# Allegro board CALITESCU ROMEO-ALEXANDRU PROIECT 1 431E.brd
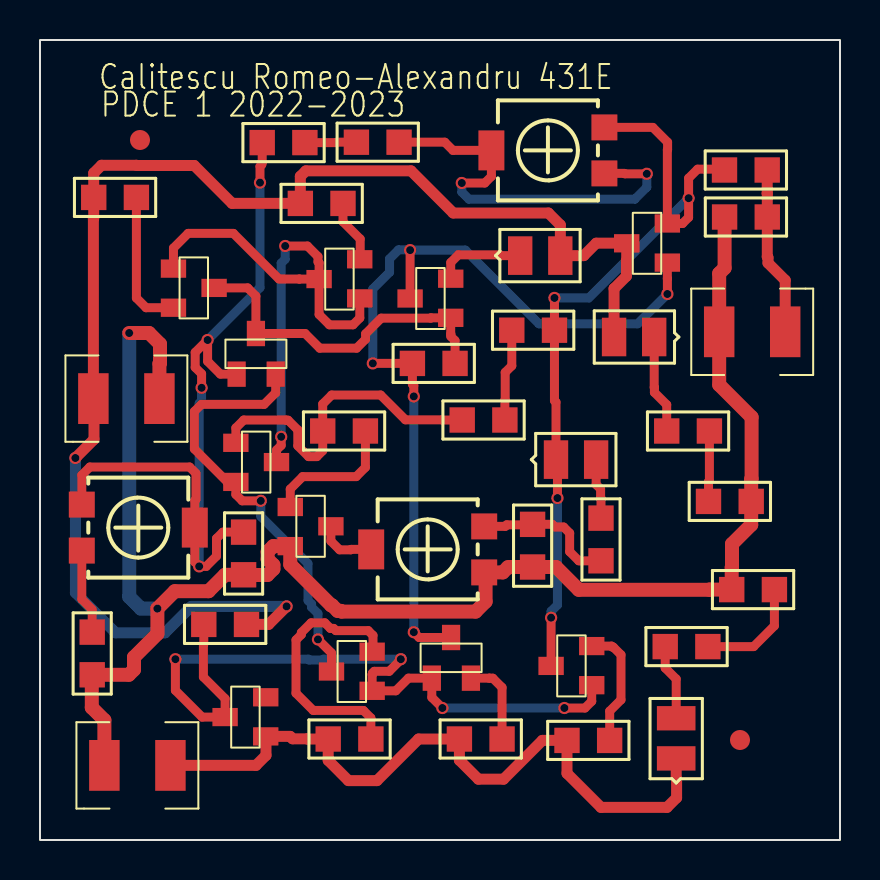
[diagram p0: board, top side]
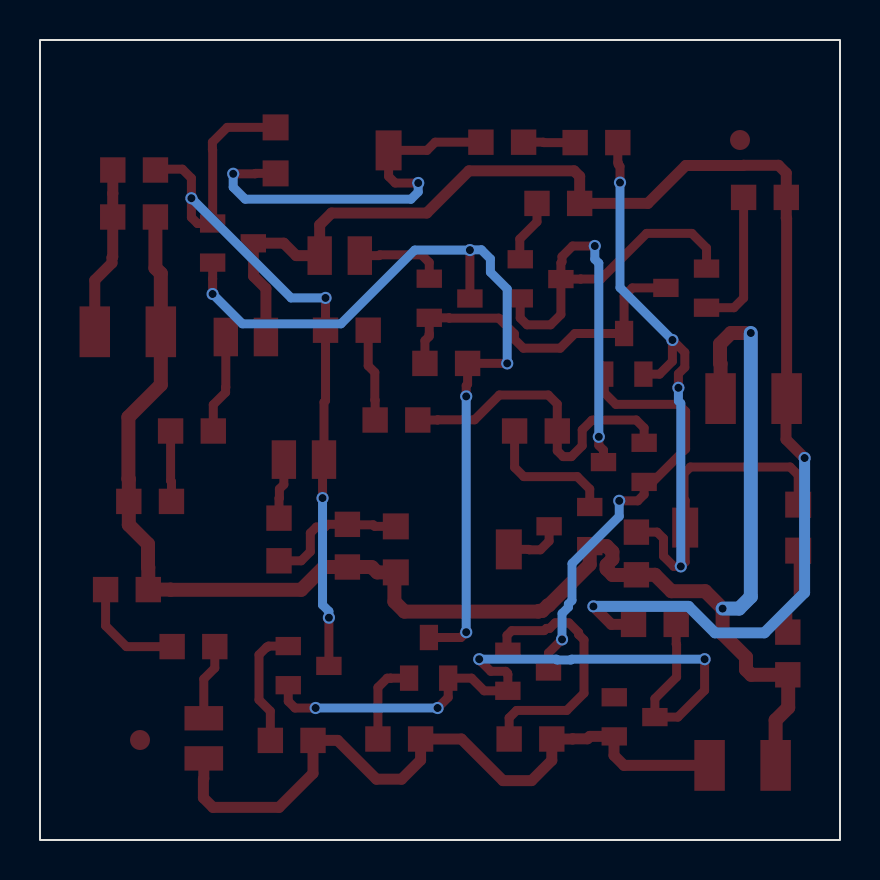
[diagram p1: board, bottom side, seen from below]

Outline 40 x 40 mm; copper layers: TOP, BOTTOM. Coordinates in mm from the lower left corner of the outline.
Outline path: rectangle 0,0 40,40

## Design rules (mm)
nets with their own width: min track width 0.45; nets N00982 N00986 N01026 N01039 N01083 N01217 N01415 N01445 N01479 N01496 N01500 N01504 N01521 N01535 N01539 N01543 N01576 N01672 N04561 N04653 N17784 N25401 N26719 N26734 N26820 N26835
nets with their own width: min track width 0.55; nets OUT V+ V-
nets with their own width: min track width 0.7; nets GND

## Placement (name value [footprint] x y rotation side)
C1  10n  [SMC0805]  11.11 34.87 0 top
C2  470n  [SMC0805]  24.63 13.65 90 top
C3  10n  [SMC0805]  10.18 13.26 90 top
C4  220p  [SMC0805]  18.62 23.83 0 top
C5  1u  [SMC0805]  36.36 33.5 180 top
D1  DIODE  [SMD0805]  24.01 29.22 0 top
D2  DIODE  [SMD0805]  25.8 19.02 0 top
DZ  BZX84-C5V6  [TO236]  11.16 5.18 0 top
J1  CON2  [1210RF_WV_12D]  4.32 22.07 180 top
J2  CON2  [1210RF_WV_12D]  4.87 3.73 180 top
J3  CON2  [1210RF_WV_12D]  35.61 25.41 0 top
LED1  SMLS14BET  [SMD0805]  30.71 25.15 180 top
LED2  SMLS14BET  [SMD0805]  31.81 4.08 90 top
NOREF  -  [unnamed]  35 5 0 top
NOREF#2  -  [unnamed]  5 35 0 top
Q1  QBC846B  [TO236]  9.83 23.42 270 top
Q2  QBC846B  [TO236]  9.92 19.86 180 top
Q3  QBC856B  [TO236]  20.41 26.11 0 top
Q4  QBC846B  [TO236]  31.24 28.87 0 top
Q6  QBC856B  [TO236]  6.8 28.57 180 top
Q7  QBC856B  [TO236]  15.86 27.08 0 top
Q8  QBC846B  [TO236]  16.48 7.46 0 top
Q9  QBC846B  [TO236]  19.59 8.22 270 top
Q10  JMMBFJ309LT1  [TO236]  12.64 16.65 180 top
Q11  QBC846B  [TO236]  27.46 7.74 0 top
R1  50k  [TS53YL]  28.22 35.63 0 top
R2  2.7k  [SMR0805]  15.82 34.89 0 top
R3  50k  [TS53YL]  2.09 14.47 180 top
R4  2.7k  [SMR0805]  2.61 8.26 90 top
R5  2k  [SMR0805]  8.19 10.78 0 top
R6  3.9k  [SMR0805]  14.41 5.05 0 top
R7  2k  [SMR0805]  20.97 5.05 0 top
R9  100  [SMR0805]  4.82 32.13 180 top
R10  100  [SMR0805]  15.15 31.83 180 top
R11  1k  [SMR0805]  16.27 20.45 180 top
R12  1k  [SMR0805]  28.05 13.96 90 top
R13  500k  [TS53YL]  22.21 15.68 0 top
R14  100  [SMR0805]  23.59 25.49 0 top
R15  2k  [SMR0805]  26.35 4.98 0 top
R16  2.7k  [SMR0805]  21.11 21 0 top
R17  2k  [SMR0805]  33.47 20.45 180 top
R18  2k  [SMR0805]  35.56 16.93 180 top
R19  2k  [SMR0805]  36.72 12.52 180 top
R20  2k  [SMR0805]  31.26 9.67 0 top
RL  2k  [SMR0805]  34.23 31.15 0 top

## Library data of the parts
C1-C5 = C
D1 D2 = DIODE_0
DZ = BZX84-C5V6_0
J1-J3 = CON2
LED1 LED2 = SMLS14BET_1
Q1 Q2 Q4 Q8 Q9 Q11 = QBC846B_1
Q3 Q6 Q7 = QBC856B_0
Q10 = JMMBFJ309LT1_0
R1 R3 R13 = POT
R2 R4-R7 R9-R12 R14-R20 RL = R

## Footprints (pads in the part's own frame, mm; a bottom-side part is the same pattern mirrored in y, then rotated)
1210RF_WV_12D
  rect 1.524x2.54 smd: 1(-1.651,0) 2(1.651,0)
SMC0805
  rect 1.27x1.27 smd: 1(0,0) 2(2.134,0)
SMD0805
  rect 1.219x1.93 smd: A(2.007,0) C(0,0)
SMR0805
  rect 1.27x1.27 smd: 1(0,0) 2(2.134,0)
TO236
  rect 1.27x0.914 smd: 1(0.127,0) 2(0.127,1.956) 3(-1.905,0.965)
TS53YL
  rect 1.3x1.3 smd: 1(0,0) 3(0,-2.3)
  rect 1.3x2 smd: 2(-5.65,-1.15)
unnamed
  round 1 smd: (0,0)

## Nets
GND: C2.1 C3.1 J1.1 J2.2 J3.1 Q10.2(S) R4.1 R13.3(2) R18.1 R19.2 RL.1
OUT: C5.1 J3.2 RL.2
V+: D1.A J1.2 LED1.A Q4.3(C) R5.2 R9.2 R10.2
V-: DZ.1(A) J2.1 LED2.C R6.1 R7.1 R15.1
N00982: C1.2 R2.1
N00986: R1.2(T) R1.3(2) R2.2
N01026: R3.1 R4.2
N01039: C1.1 C3.2 Q1.1(B) R3.2(T) R3.3(2)
N01083: C5.2 D2.C Q4.2(E) Q11.3(C) R1.1 R14.2
N01217: Q1.2(E) Q2.2(E) Q8.3(C)
N01415: DZ.3(C) Q8.1(B) Q9.1(B) Q11.1(B) R5.1
N01445: Q8.2(E) R6.2
N01479: C4.2 Q1.3(C) Q3.1(B) Q6.3(C)
N01496: Q6.2(E) R9.1
N01500: Q7.2(E) R10.1
N01504: Q2.3(C) Q6.1(B) Q7.1(B) Q7.3(C)
N01521: Q2.1(B) R11.2 R16.1
N01535: Q10.1(D) R11.1
N01539: Q10.3(G) R13.2(T)
N01543: C2.2 R12.1 R13.1
N01576: C4.1 Q3.3(C) Q4.1(B) Q9.3(C)
N01672: Q9.2(E) R7.2
N04561: D1.C Q3.2(E)
N04653: D2.A R12.2
N17784: Q11.2(E) R15.2
N25401: R14.1 R16.2
N26719: LED1.C R17.2
N26734: R17.1 R18.2
N26820: R19.1 R20.2
N26835: LED2.A R20.1

Pads without a net: DZ 2

## Via types
v1: diameter 0.61, hole 0.4, TOP to BOTTOM, 27 vias

## Routing (per net, layer and track width the routed paths; a pad name or vN(x,y) marks a point on that pad's centre or on a via; arc(x,y) is an arc through that point)
GND: length 84.9
  TOP w0.7: RL.1 34.23,28.6 33.96,28.33 33.96,22.76 35.58,21.14 35.58,18.06 35.56,18.04 R18.1 35.56,15.76 34.6,14.8 34.6,13.65 34.59,13.63 R19.2 33.47,12.52 33.46,12.51 26.94,12.51 25.8,13.65 C2.1 23.52,13.65 23.51,13.64 23.4,13.64 23.14,13.38 R13.3 22.28,13.31 22.28,11.92 21.78,11.42 15.08,11.42 15.04,11.46 14.88,11.46 14.6,11.73 14.56,11.73 12.51,13.78 Q10.2 11.66,14.69 11.38,14.41 11.38,14.04 11.67,13.75 11.67,13.55 11.37,13.25 10.19,13.25 C3.1 9.25,13.26 8.43,12.44 6.74,12.44 v1(5.87,11.57) 5.87,10.31 4.7,9.14 4.7,8.52 4.44,8.26 R4.1 2.59,8.24 2.59,6.62 3.22,5.99 J2.2 ; v1(4.46,25.35) 5.45,25.35 6,24.8 6,23.85 5.97,23.82 J1.1
  BOTTOM w0.7: v1(4.46,25.35) 4.46,12.16 5.05,11.57 v1(5.87,11.57)
OUT: length 8.5
  TOP w0.55: C5.1 36.36,32.33 36.36,32.33 RL.2 36.36,29.16 36.4,29.12 36.4,28.85 37.26,27.99 J3.2
V+: length 72.6
  TOP w0.55: LED1.A 28.7,27.57 29.32,28.19 29.32,28.96 29.34,28.98 29.34,29.84 29.33,29.84 27.81,29.84 27.19,29.22 D1.A 26.02,30.75 25.42,31.35 20.66,31.35 18.55,33.46 13.29,33.46 13.02,33.18 R10.2 9.61,31.83 7.71,33.73 4.87,33.73 4.82,33.74 3.08,33.74 2.69,33.35 R9.2 2.69,31.09 2.67,31.08 2.67,22.07 2.7,22.04 2.7,20.03 v1(1.77,19.1) ; v1(12.33,11.68) 11.43,10.78 R5.2
  BOTTOM w0.55: v1(12.33,11.68) 7.57,11.68 6.25,10.36 3.78,10.36 1.77,12.37 v1(1.77,19.1)
V-: length 35.7
  TOP w0.55: J2.1 10.8,3.73 11.3,4.23 11.3,5.17 DZ.1 12.51,5.18 12.63,5.06 13.36,5.06 13.37,5.05 R6.1 14.41,3.98 15.42,2.97 16.85,2.97 18.93,5.05 R7.1 20.97,3.99 21.92,3.04 23.18,3.04 25.12,4.98 R15.1 26.35,3.33 28.05,1.63 31.35,1.63 31.83,2.11 31.83,3.05 31.81,3.07 LED2.C
N00982: length 2.6
  TOP w0.45: R2.1 14.83,34.89 14.81,34.87 C1.2
N00986: length 20.6
  TOP w0.45: R2.2 20.24,34.89 20.65,34.48 R1.2 22.57,33.18 22.24,32.85 v1(21.09,32.85) ; v1(30.34,33.31) 29.24,33.31 29.22,33.33 R1.3
  BOTTOM w0.45: v1(30.34,33.31) 30.34,32.64 29.74,32.04 21.45,32.04 21.09,32.4 v1(21.09,32.85)
N01026: length 4.3
  TOP w0.45: R3.1 2.09,12.04 2.61,11.52 R4.2
N01039: length 41.2
  TOP w0.45: C3.2 9.14,15.39 8.83,15.08 8.83,14.19 8.31,13.68 v1(7.96,13.68) 7.74,13.9 R3.2 7.74,16.97 7.8,17.03 7.8,18.33 7.48,18.65 2.49,18.65 2.09,18.25 R3.3 ; v1(8.08,22.61) 8.08,23.31 7.76,23.63 7.76,24.38 v1(8.38,25) 8.38,23.93 9.02,23.29 9.83,23.29 ; C1.1 11.11,33.88 11.09,33.86 11.09,33.77 11,33.68 v1(11,32.87)
  BOTTOM w0.45: v1(7.96,13.68) 7.96,21.83 8.08,21.95 v1(8.08,22.61) ; v1(8.38,25) 11,27.62 v1(11,32.87)
N01083: length 40
  TOP w0.45: Q11.3 v1(25.55,11.12) ; v1(25.72,27.1) R14.2 25.72,21.97 25.8,21.89 D2.C 25.87,18.95 v1(25.87,17.1) ; C5.2 34.19,33.54 32.88,33.54 32.43,33.09 v1(32.43,32.09) 32.43,31.13 32.13,30.83 31.37,30.83 31.37,34.51 31.38,34.52 31.38,34.89 30.64,35.63 R1.1
  BOTTOM w0.45: v1(25.87,17.1) 25.87,11.75 25.55,11.44 v1(25.55,11.12) ; v1(32.43,32.09) 27.44,27.1 v1(25.72,27.1)
N01217: length 22
  TOP w0.45: Q8.3 14.57,9.35 v1(13.9,10.03) ; 11.79,23.29 11.79,22.36 11.2,21.78 8.07,21.78 7.72,21.43 7.72,19.55 9.37,17.9 Q2.2 9.79,17.28 10.11,16.96 v1(11.04,16.96)
  BOTTOM w0.45: v1(11.04,16.96) 11.04,16.18 13.4,13.82 13.4,11.98 13.58,11.8 13.58,11.64 13.9,11.32 v1(13.9,10.03)
N01415: length 37
  TOP w0.45: v1(20.12,6.6) 19.59,7.13 Q9.1 18.42,8.09 17.79,7.46 Q8.1 16.61,8.27 16.62,8.28 16.62,8.34 16.71,8.43 17.46,8.43 18.04,9.01 v1(18.04,9.04) ; Q11.1 27.59,6.94 27.25,6.6 v1(26.22,6.6) ; R5.1 8.19,9.79 8.17,9.77 8.17,8.15 9.26,7.07 DZ.3 8.1,6.15 6.77,7.48 v1(6.77,9.04)
  BOTTOM w0.45: v1(20.12,6.6) v1(26.22,6.6) ; v1(6.77,9.04) 13.42,9.04 13.46,9 14.14,9 14.18,9.04 v1(18.04,9.04)
N01445: length 13.3
  TOP w0.45: Q8.2 16.65,9.46 16.65,10.23 16.41,10.47 14.79,10.47 14.68,10.58 14.52,10.58 14.24,10.86 13.55,10.86 13.07,10.37 13.07,10.27 12.8,10 12.8,7.34 13.66,6.48 16.17,6.48 16.54,6.1 R6.2
N01479: length 17.3
  TOP w0.45: Q6.3 10.39,27.6 10.8,27.19 10.8,25.32 13.26,25.32 13.99,24.59 15.83,24.59 16.28,25.04 16.28,25.31 17.06,26.09 19.53,26.09 19.55,26.11 Q3.1 20.54,25.3 20.54,25.3 20.54,25.18 20.75,24.97 C4.2
N01496: length 7.1
  TOP w0.45: R9.1 4.82,27.1 5.3,26.61 Q6.2
N01500: length 3.2
  TOP w0.45: R10.1 15.15,30.91 16.01,30.05 16.01,29.06 Q7.2
N01504: length 28.7
  TOP w0.45: Q7.3 13.96,28.85 13.9,28.91 13.9,29.17 13.37,29.7 v1(12.26,29.7) ; Q7.3 12.97,28.05 12.96,28.05 11.95,28.05 9.67,30.33 7.41,30.33 6.67,29.6 Q6.1 ; Q7.3 13.96,26.27 14.47,25.76 15.65,25.76 15.99,26.1 15.99,27.08 Q7.1 ; v1(12.06,20.16) 12.06,19.73 11.82,19.5 Q2.3
  BOTTOM w0.45: v1(12.06,20.16) 12.06,28.84 12.26,29.04 v1(12.26,29.7)
N01521: length 16.6
  TOP w0.45: R16.1 20.12,21 20.11,21.01 18.27,21.01 17.03,22.25 14.59,22.25 14.14,21.8 R11.2 14.14,19.46 13.84,19.17 13.43,19.17 12.89,19.71 12.89,20.5 12.4,20.99 12.29,20.99 12.28,21 10.19,21 9.79,20.6 Q2.1
N01535: length 6.9
  TOP w0.45: Q10.1 12.51,17.55 13.14,18.17 15.81,18.17 16.27,18.63 R11.1
N01539: length 2.9
  TOP w0.45: R13.2 15.56,14.53 15.54,14.51 14.98,14.51 14.54,14.95 Q10.3
N01543: length 7.2
  TOP w0.45: R12.1 26.94,13.96 26.48,14.42 26.48,15.35 26.18,15.65 25.75,15.65 25.62,15.78 C2.2 24.61,15.76 23.34,15.76 23.26,15.68 R13.1
N01576: length 43.2
  TOP w0.45: v1(18.69,10.39) 18.95,10.12 Q9.3 ; Q3.3 v1(18.5,29.5) ; v1(16.64,23.83) C4.1 18.62,22.79 18.69,22.72 v1(18.69,22.18) ; v1(31.37,27.3) 31.37,28.06 31.37,28.06 31.37,28.87
  BOTTOM w0.45: v1(18.69,10.39) v1(18.69,22.18) ; v1(16.64,23.83) 16.64,27.55 17.48,28.39 17.48,29.06 17.93,29.51 18.49,29.51 v1(18.5,29.5) 21.27,29.5 24.95,25.81 29.88,25.81 v1(31.37,27.3)
N01672: length 4.3
  TOP w0.45: R7.2 23.1,7.63 22.64,8.09 22.47,8.09 22.47,8.09 Q9.2
N04561: length 4.5
  TOP w0.45: D1.C 23.05,29.22 23.01,29.26 20.92,29.26 20.54,28.88 Q3.2
N04653: length 3
  TOP w0.45: R12.2 28.05,17.08 28.03,17.1 28.03,17.55 27.81,17.77 D2.A
N17784: length 6.2
  TOP w0.45: R15.2 28.48,6.44 29.05,7.01 29.05,9.26 28.67,9.64 28.63,9.64 28.57,9.7 Q11.2
N25401: length 4.6
  TOP w0.45: R14.1 23.59,23.71 23.26,23.38 23.26,22 23.24,21.99 R16.2
N26719: length 5
  TOP w0.45: R17.2 31.34,21.76 30.72,22.38 30.72,22.63 30.71,22.64 LED1.C
N26734: length 3.5
  TOP w0.45: R18.2 33.43,17.92 33.47,17.96 R17.1
N26820: length 5.6
  TOP w0.45: R19.1 36.72,10.71 35.68,9.67 R20.2
N26835: length 3.8
  TOP w0.45: R20.1 31.26,8.6 31.81,8.05 LED2.A

## Text on the board
Ref Des/Silkscreen Top: Calitescu Romeo-Alexandru 431E | PDCE 1 2022-2023
XSECTION_CHART: *  SURFACE - AIR 0 MM | L1: TOP CONDUCTOR - COPPER 0.018 MM | *  DIELECTRIC - FR-4 1.464 MM | L2: BOTTOM CONDUCTOR - COPPER 0.018 MM | DESIGN CROSS SECTION CHART | ___________________________ | TOTAL THICKNESS 1.5 MM | 1-2
DISPLAY_TOP: FIGURE | SIZE | 0.4 | DRILL CHART: TOP to BOTTOM | ALL UNITS ARE IN MILLIMETERS | PLATED | QTY | 27
